# EAGLE board turnstile swing NEW (EAGLE 9.6.2)
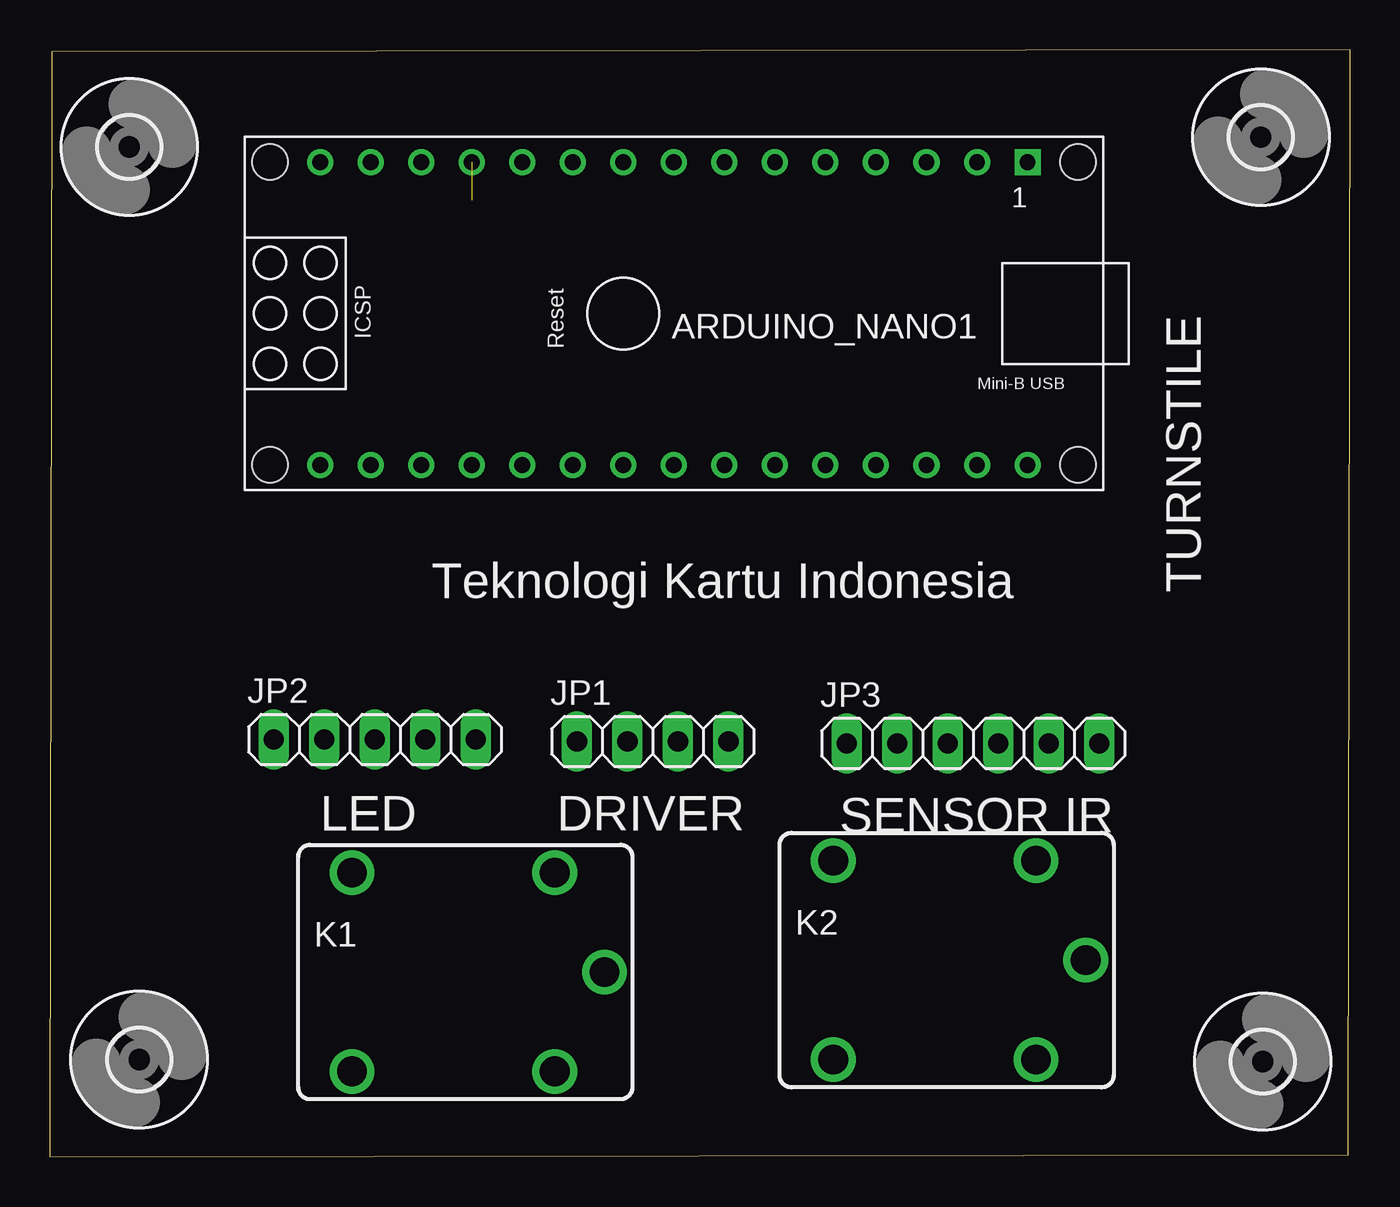
[diagram p0: board, top side]
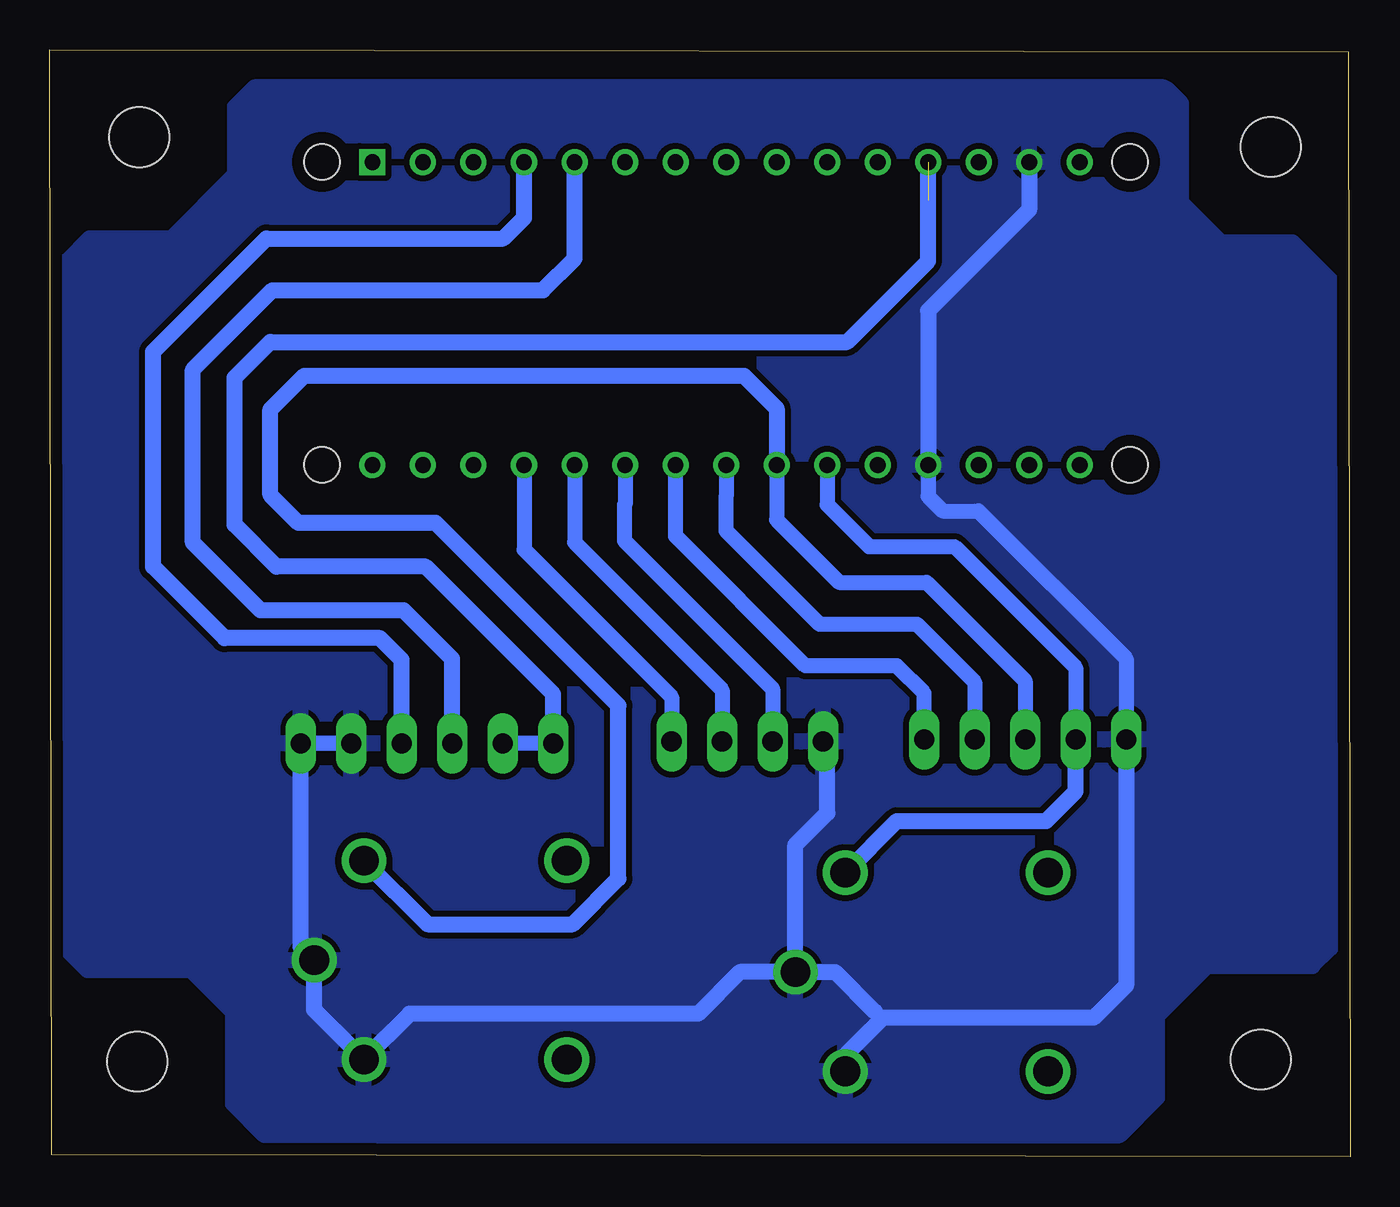
[diagram p1: board, bottom side, seen from below]

Size 65.4 x 55.7 mm. Coordinates in mm from the lower left corner, seen from the top.
Outline: 0,0 65.3,0.1 65.4,55.7 0.1,55.6 0,0
Copper layers (1*16): Top 0.035mm / dielectric 1.5mm / Bottom 0.035mm
Design rules "default": minimum track width 6mil, minimum drill 0.35mm, track to track 12mil, track to pad 12mil, pad to pad 12mil, via to via 6mil, smd to smd 12mil, copper to edge 24mil, drill to drill 6mil, minimum pad ring 10mil, minimum via ring 8mil, stop-mask expansion 4mil, vias tented up to drill 0mil, thermal gap 10mil

## Footprints (pad centres in the part's own frame; a part is rotated, then mirrored left to right if it is on the bottom)
ARDUINO_NANO = drill 0.8 square: 1 -20.32,-7.62 | drill 0.8: 2 -17.78,-7.62; 3 -15.24,-7.62; 4 -12.7,-7.62; 5 -10.16,-7.62; 6 -7.62,-7.62; 7 -5.08,-7.62; 8 -2.54,-7.62; 9 0,-7.62; 10 2.54,-7.62; 11 5.08,-7.62; 12 7.62,-7.62; 13 10.16,-7.62; 14 12.7,-7.62; 15 15.24,-7.62; 16 15.24,7.62; 17 12.7,7.62; 18 10.16,7.62; 19 7.62,7.62; 20 5.08,7.62; 21 2.54,7.62; 22 0,7.62; 23 -2.54,7.62; 24 -5.08,7.62; 25 -7.62,7.62; 26 -10.16,7.62; 27 -12.7,7.62; 28 -15.24,7.62; 29 -17.78,7.62; 30 -20.32,7.62 | hole 1.778: -22.86,-7.62; -22.86,7.62; 17.78,7.62; 17.78,-7.62
3,0 = hole 3: 0,0
1X04 = drill 1.016 long: 1 -3.81,0; 2 -1.27,0; 3 1.27,0; 4 3.81,0
1X05 = drill 1.016 long: 1 -5.08,0; 2 -2.54,0; 3 0,0; 4 2.54,0; 5 5.08,0
1X06 = drill 1.016 long: 1 -6.35,0; 2 -3.81,0; 3 -1.27,0; 4 1.27,0; 5 3.81,0; 6 6.35,0
CQ1 = drill 1.5: 1 4.5,-5; 2 4.5,5; C 7,0; NC -5.7,-5; NO -5.7,5

## Placement (x,y rotation side)
ARDUINO_NANO1  [ARDUINO_NANO]  28.85,42.43 180 top
H1  MOUNT-HOLE3.0  [3,0]  4,50.8 180 top
H2  MOUNT-HOLE3.0  [3,0]  60.9,51.3 0 top
H3  MOUNT-HOLE3.0  [3,0]  4.5,4.9 0 top
H4  MOUNT-HOLE3.0  [3,0]  61,4.8 0 top
JP1  [1X04]  30.32,20.9 0 top
JP2  [1X05]  16.35,21 0 top
JP3  [1X06]  46.43,20.8 0 top
K1  CQ1-12V  [CQ1]  20.9,9.3 0 top
K2  CQ1-12V  [CQ1]  45.1,9.9 0 top

## Library data of the parts
ARDUINO_NANO1 = ArduinoNanoV30
H1-H4 = holes
JP1-JP3 = pinhead
K1 K2 = relay; OC_FARNELL: unknown; OC_NEWARK: unknown

## Nets
GND: ARDUINO_NANO1.14 ARDUINO_NANO1.19 JP1.1 JP2.1 JP3.5 JP3.6 K1.1 K1.C K2.1 K2.C
N$1: ARDUINO_NANO1.12 JP3.1 JP3.2
N$2: ARDUINO_NANO1.5 JP3.3
N$3: ARDUINO_NANO1.4 JP3.4
N$4: ARDUINO_NANO1.25 JP1.2
N$5: ARDUINO_NANO1.26 JP1.3
N$6: ARDUINO_NANO1.27 JP1.4
N$7: ARDUINO_NANO1.21 JP2.2 K1.2
N$8: ARDUINO_NANO1.22 JP2.3 K2.2
N$9: ARDUINO_NANO1.23 JP2.4
N$10: ARDUINO_NANO1.24 JP2.5
VIN: ARDUINO_NANO1.15

## Tracks (layer width: path | path; a pad name or v marks a point on that pad's centre or on a via)
GND
  Bottom 0.75: ARDUINO_NANO1.19 21.23,33.23 20.5,32.5 18.7,32.5 11.27,25.07 JP2.1 11.3,20.97 | JP3.5 JP3.6
  Bottom 0.8: ARDUINO_NANO1.14 16.15,47.65 21.23,42.57 ARDUINO_NANO1.19 | JP2.1 11.27,8.63 12.9,7 23.5,7 25.4,5.1 K1.1 | K1.C 25.9,9.3 23.9,7.3 | K1.C 27.9,15.7 26.3,17.3 26.3,20.69 JP1.1 | K1.C 30.7,9.3 32.8,7.2 47.3,7.2 K2.1 52.1,7.4 K2.C 52.78,10.58 JP3.6
  pour Bottom: 9.4,53.8 55.1,53.8 56.1,52.8 56.1,49.4 59.3,46.2 63.4,46.2 64.5,45.1 64.5,10.4 63.5,9.4 58.5,9.4 58.4,9.5 56.2,7.3 56.2,2.7 54.6,1.1 53.9,1.1 11.6,1.1 9.7,3 9.7,7.1 7.2,9.6 1.9,9.6 1,10.5 1,44.1 2.9,46 6.5,46 8.5,48 8.5,53 9.2,53.7
N$1  (1 unrouted)
  Bottom 0.75: JP3.1 JP3.2 | 21.23,48.13 21.2,48.1
  Bottom 0.8: JP3.1 40.08,23.28 46.5,29.7 54,29.7 56.1,31.8 56.1,39.2 54.3,41 25.3,41 21.23,45.07 ARDUINO_NANO1.12
N$2
  Bottom 0.8: JP3.3 45.16,25.06 47.6,27.5 54.8,27.5 58.2,30.9 58.2,39.6 54.2,43.6 40.6,43.6 39.01,45.19 ARDUINO_NANO1.5
N$3
  Bottom 0.8: JP3.4 47.7,25 48.8,26.1 56.6,26.1 60.2,29.7 60.2,40.5 54.5,46.2 42.6,46.2 41.55,47.25 ARDUINO_NANO1.4
N$4
  Bottom 0.75: ARDUINO_NANO1.25 36.47,32.83 36.5,32.8 36.5,31 29.05,23.55 JP1.2
N$5
  Bottom 0.75: ARDUINO_NANO1.26 39.01,30.91 31.59,23.49 JP1.3
N$6
  Bottom 0.75: ARDUINO_NANO1.27 41.55,30.55 34.13,23.13 JP1.4
N$7
  Bottom 0.75: ARDUINO_NANO1.21 26.31,32.81 24.2,30.7 19.9,30.7 13.81,24.61 13.81,21.5 JP2.2
  Bottom 0.8: K1.2 22.8,16.9 15.3,16.9 13.81,18.39 13.81,21.5
N$8
  Bottom 0.75: ARDUINO_NANO1.22 28.85,34.4 28.85,32.05 25.7,28.9 21.3,28.9 16.35,23.95 JP2.3
  Bottom 0.8: K2.2 46.4,11.7 39.1,11.7 36.8,14 36.8,22.7 46,31.9 52.9,31.9 54.3,33.3 54.3,37.6 52.6,39.3 30.5,39.3 28.85,37.65 28.85,34.4
N$9
  Bottom 0.75: ARDUINO_NANO1.23 31.39,33.21 31.4,33.2 31.4,31.5 26.7,26.8 21.8,26.8 18.89,23.89 JP2.4
N$10
  Bottom 0.75: JP2.5 21.43,23.33 22.8,24.7 27.4,24.7 33.93,31.23 ARDUINO_NANO1.24

## Text on the board
tNames: TURNSTILE | Teknologi Kartu Indonesia | LED | DRIVER | SENSOR IR